# Altium PCB adio.PCBDOC (part 3 of 3)
Units mil, origin at the board's own origin, x right, y up, seen from the top; angles counter-clockwise.
Board outline 7750 x 4500 mil, 6 copper layers (Top Layer, Internal Plane 1, Mid-Layer 1, Mid-Layer 2, Internal Plane 2, Bottom Layer); 163 components, 231 nets, 1195 pads, 503 vias.
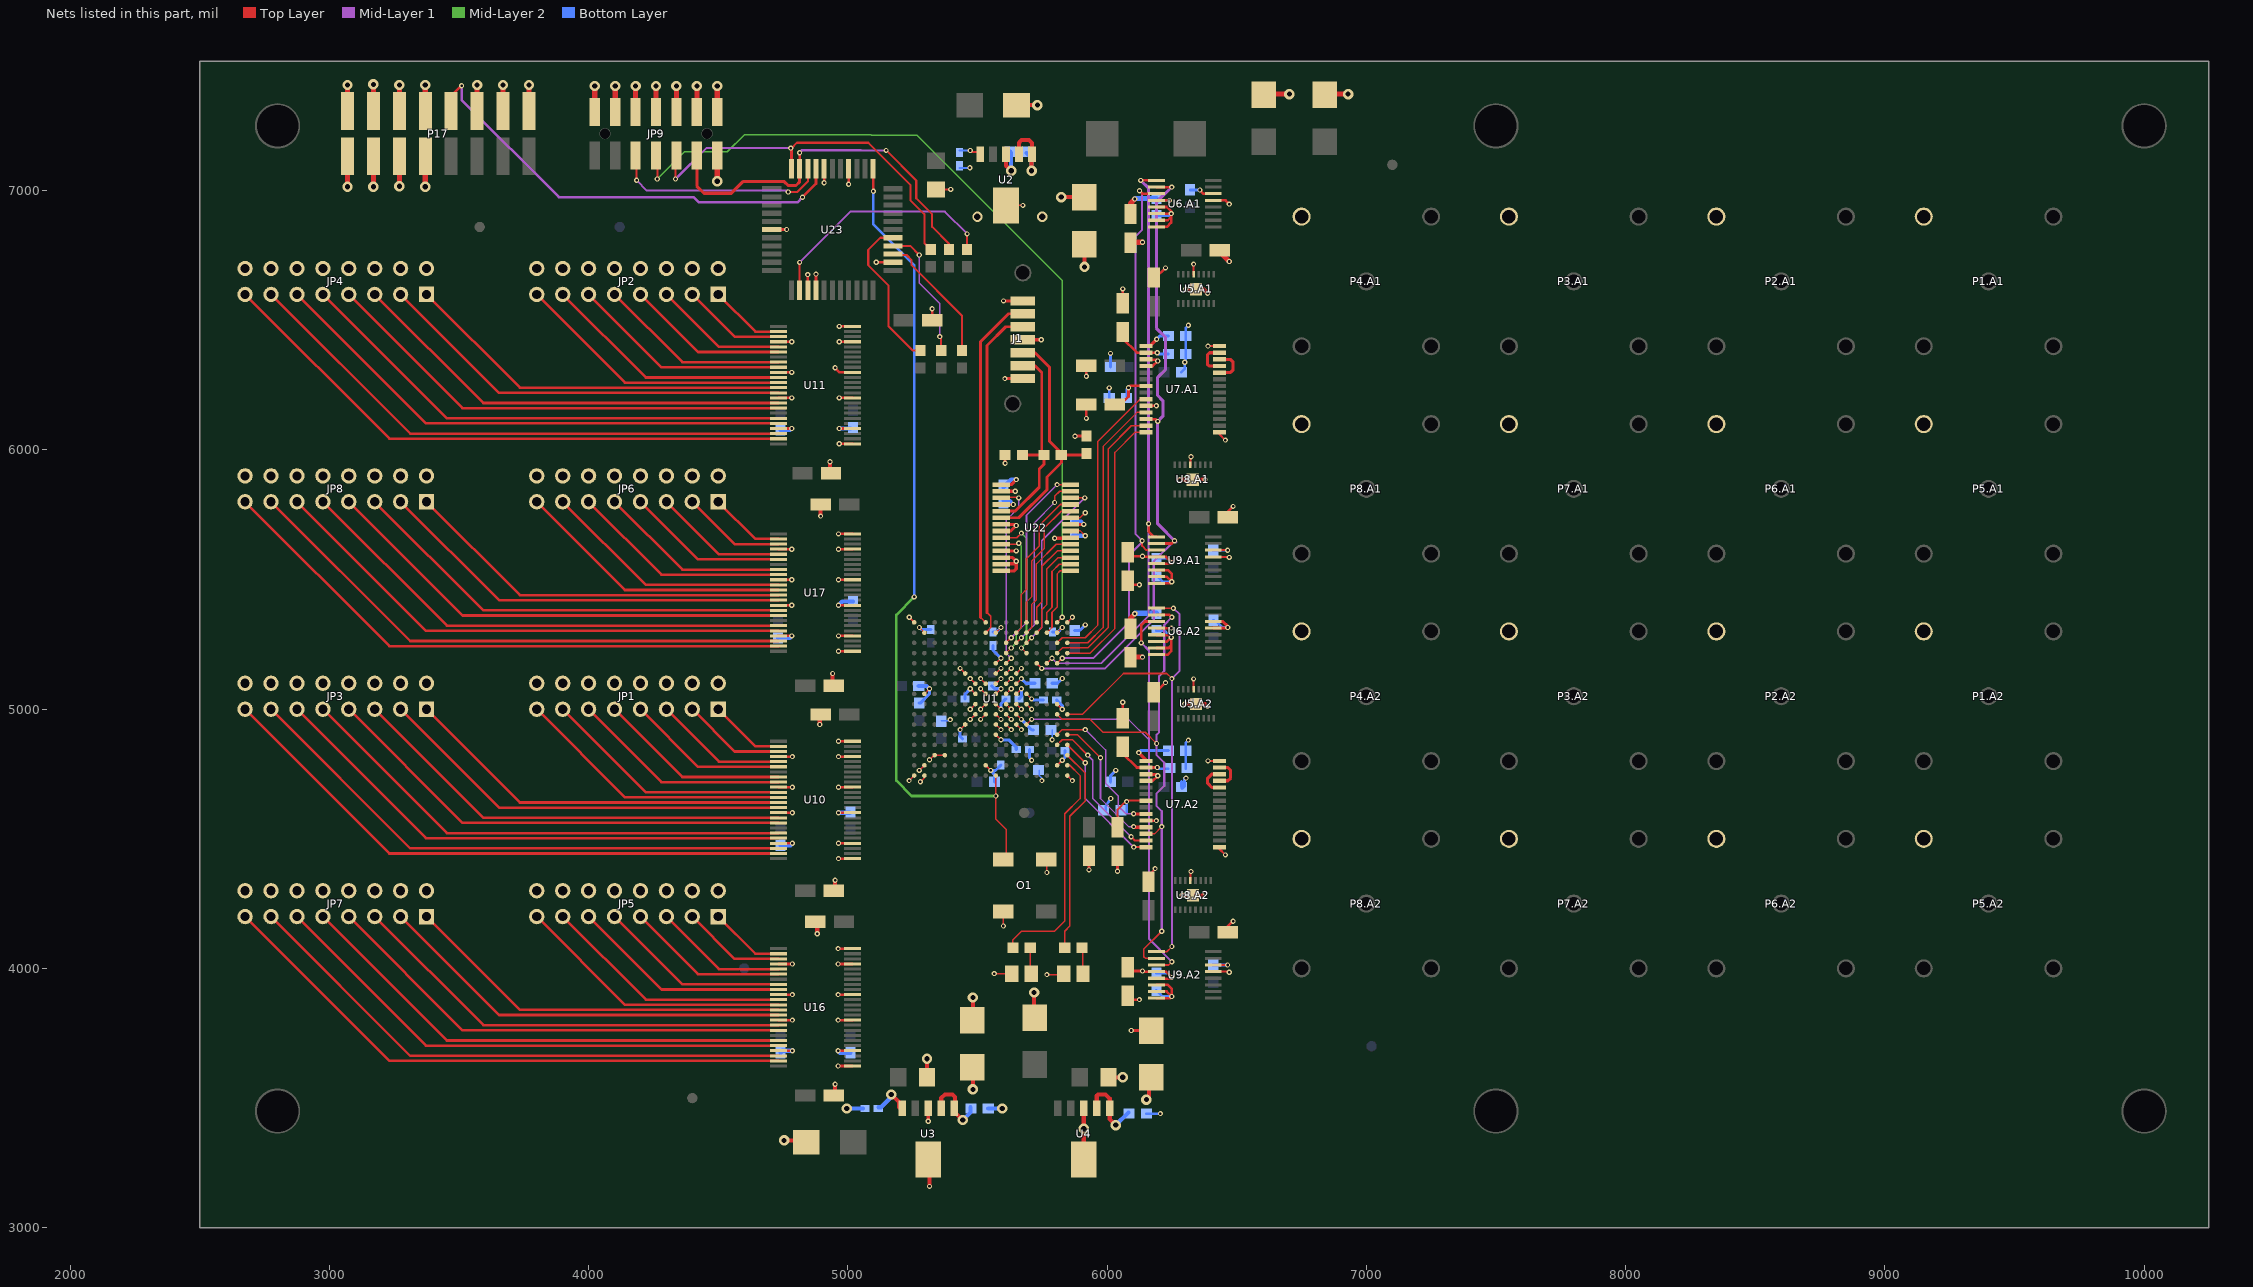
[diagram p7: the nets of this part, all layers, seen from the top]

## Via types
v1: diameter 20, hole 10, Top Layer to Bottom Layer, 322 vias
v2: diameter 20, hole 10, Top Layer to Bottom Layer, tented top, 122 vias
v3: diameter 40, hole 20, Top Layer to Bottom Layer, 57 vias
v4: diameter 40, hole 25, Top Layer to Bottom Layer, 2 vias

## Nets (pads, with @x,y where several pads share a name; then routed paths per layer and width w, separated by ;. In a path a pad name is that pad's centre, name@x,y a point inside that pad or via, vN(x,y) a via of type N, cw(c..) or ccw(c..) an arc to the next point about the centre after c; other vN are vias at no path point) (continued)
GND: C1.2 C2.1 C3.1 C4.A1.2 C4.A2.2 C5.A1.2 C5.A2.2 C6.A1.2 C6.A2.2 C7.A1.2 C7.A2.2 C8.A1.2 C8.A2.2 C9.A1.2 C9.A2.2 C10.A1.2 C10.A2.2 C11.A1.2 C11.A2.2 C12.A1.2 C12.A2.2 C13.A1.2 C13.A2.2 C14.A1.2 C14.A2.2 C15.A1.2 C15.A2.2 C16.A1.2 C16.A2.2 C17.A1.2 C17.A2.2 C18.A1.2 C18.A2.2 C19.A1.2 C19.A2.2 C20.2 C21.A1.2 C21.A2.2 C22.2 C23.2 C24.2 C25.2 C26.2 C27.2 C28.2 C29.2 C30.2 C31.2 C32.2 C33.2 C34.2 C35.2 C36.2 C37.2 C38.2 C39.2 C40.2 C41.2 C43.2 C44.2 C45.2 C46.1 C47.1 C48.2 C51.2 C52.2 C53.2 C55.2 C56.2 C57.2 C58.2 C59.2 C61.2 C62.2 C64.2 C65.2 C71.1 C73.1 C74.1 C75.2 C76.2 C77.1 C78.2 C80.1 C88.2 C98.2 C99.1 DS1.2 DS2.2 J1.1 J1.4 J1.7 JP1.2 JP1.4 JP1.6 JP1.8 JP1.10 JP1.12 JP1.14 JP1.16 JP2.2 JP2.4 JP2.6 JP2.8 JP2.10 JP2.12 JP2.14 JP2.16 JP3.2 JP3.4 JP3.6 JP3.8 JP3.10 JP3.12 JP3.14 JP3.16 JP4.2 JP4.4 JP4.6 JP4.8 JP4.10 JP4.12 JP4.14 JP4.16 JP5.2 JP5.4 JP5.6 JP5.8 JP5.10 JP5.12 JP5.14 JP5.16 JP6.2 JP6.4 JP6.6 JP6.8 JP6.10 JP6.12 JP6.14 JP6.16 JP7.2 JP7.4 JP7.6 JP7.8 JP7.10 JP7.12 JP7.14 JP7.16 JP8.2 JP8.4 JP8.6 JP8.8 JP8.10 JP8.12 JP8.14 JP8.16 JP9.1 JP9.3 JP9.5 JP9.7 JP9.9 JP9.11 JP9.13 O1.2 P1.A1.2 P1.A2.2 P2.A1.2 P2.A2.2 P3.A1.2 P3.A2.2 P4.A1.2 P4.A2.2 P5.A1.2 P5.A2.2 P6.A1.2 P6.A2.2 P7.A1.2 P7.A2.2 P8.A1.2 P8.A2.2 P17.9 P17.10 P17.11 P17.12 P17.13 P17.14 P17.15 P17.16 R5.1 U1.A1 U1.A16 U1.B2 U1.B9 U1.B15 U1.F6 U1.F11 U1.G7 U1.G8 U1.G9 U1.G10 U1.H2 U1.H7 U1.H8 U1.H9 U1.H10 U1.J7 U1.J8 U1.J9 U1.J10 U1.J15 U1.K7 U1.K8 U1.K9 U1.K10 U1.L6 U1.L11 U1.R2 U1.R8 U1.R15 U1.T1 U1.T16 U2.3 U3.3 U4.3 U5.A1.13 U5.A2.13 U6.A1.5 U6.A1.6 U6.A1.13 U6.A1.14 U6.A1.15 U6.A1.16 U6.A2.5 U6.A2.6 U6.A2.13 U6.A2.14 U6.A2.15 U6.A2.16 U7.A1.1 U7.A1.14 U7.A1.17 U7.A1.18 U7.A1.24 U7.A2.1 U7.A2.14 U7.A2.17 U7.A2.18 U7.A2.24 U8.A1.13 U8.A2.13 U9.A1.5 U9.A1.6 U9.A1.14 U9.A1.15 U9.A1.16 U9.A2.5 U9.A2.6 U9.A2.14 U9.A2.15 U9.A2.16 U10.4 U10.10 U10.15 U10.21 U10.25 U10.28 U10.34 U10.39 U10.45 U10.48 U11.4 U11.10 U11.15 U11.21 U11.25 U11.28 U11.34 U11.39 U11.45 U11.48 U16.4 U16.10 U16.15 U16.21 U16.25 U16.28 U16.34 U16.39 U16.45 U16.48 U17.4 U17.10 U17.15 U17.21 U17.25 U17.28 U17.34 U17.39 U17.45 U17.48 U22.1 U22.12 U22.13 U22.14 U22.20 U22.22 U23.4 U23.17 U23.25 | length 13613.9
  Top Layer w6: v2(5236.22,4724.41) U1.T1@5255.91,4744.09 ; v2(5236.48,5354.59) 5255.91,5335.16 U1.A1@5255.91,5334.65 ; v2(5275.59,4763.78) U1.R2@5295.28,4783.46 ; v2(5275.85,5315.22) 5295.28,5295.79 U1.B2@5295.28,5295.28 ; U1.H2@5295.28,5059.06 v2(5314.96,5078.74) ; v2(5433.07,4921.26) U1.L6@5452.76,4940.94 ; v2(5433.07,5157.48) U1.F6@5452.76,5137.8 ; v2(5472.44,4960.63) U1.K7@5492.13,4980.31 ; v2(5472.44,5000) U1.J7@5492.13,5019.69 ; v2(5472.44,5078.74) U1.H7@5492.13,5059.06 ; v2(5472.44,5118.11) U1.G7@5492.13,5098.43 ; v2(5511.81,4960.63) U1.K8@5531.5,4980.31 ; v2(5511.81,5000) U1.J8@5531.5,5019.69 ; v2(5511.81,5078.74) U1.H8@5531.5,5059.06 ; v2(5511.81,5118.11) U1.G8@5531.5,5098.43 ; U1.R8@5531.5,4783.46 v2(5551.18,4763.78) ; v1(5564.65,3980) DS2.2@5632.6,3980 ; U1.K9@5570.87,4980.31 v2(5590.55,4960.63) ; U1.J9@5570.87,5019.69 v2(5590.55,5000) ; U1.H9@5570.87,5059.06 v2(5590.55,5078.74) ; U1.G9@5570.87,5098.43 v2(5590.55,5118.11) ; U1.B9@5570.87,5295.28 v2(5590.55,5314.96) ; U1.K10@5610.24,4980.31 v2(5629.92,4960.63) ; U1.J10@5610.24,5019.69 v2(5629.92,5000) ; U1.H10@5610.24,5059.06 v2(5629.92,5078.74) ; U1.G10@5610.24,5098.43 v2(5629.92,5118.11) ; U2.3@5610.24,6943.15 v1(5674.96,6943.15) ; U1.L11@5649.61,4940.94 v2(5669.29,4921.26) ; U1.F11@5649.61,5137.8 v2(5669.29,5157.48) ; v1(5767.72,3976.38) DS1.2@5836.61,3976.38 ; v1(5767.72,4370.08) O1.2@5767.72,4419.29 ; U1.B15@5807.09,5295.28 v2(5826.77,5314.96) ; U1.T16@5846.46,4744.09 v2(5866.14,4724.41) ; U1.A16@5846.46,5334.65 v2(5866.14,5354.33) ; U22.20@5846.46,5659.45 U22.20@5866.14,5659.45 ; v1@5905.51,5712.8 v1(5909.65,5712.8)
  Top Layer w8: C71.1@5340,7004.88 v1(5396.69,7004.88) ; U1.R15@5807.09,4783.46 v2(5826.77,4803.15) ; U1.J15@5807.09,5019.69 v2(5826.77,5000) ; C4.A2.2@6160,4335.12 6160,4360 v1(6185,4385) ; U8.A2.13@6320.94,4340 6320.94,4366.63 v1@6328.41,4374.09 ; U8.A1.13@6320.94,5940 6320.94,5966.63 v1@6328.41,5974.09 ; U5.A2.13@6333.5,5074.92 v1(6333.5,5116.99) ; U5.A1.13@6333.5,6674.92 v1(6333.5,6716.99) ; v1(6389.09,4800.59) U7.A2.14@6433.46,4800.59 ; v1(6389.09,6400.59) U7.A1.14@6433.46,6400.59 ; U9.A2.5@6409.25,3987.8 v1@6468.65,3987.8 ; U9.A2.6@6409.25,4013.39 v1(6464.72,4013.39) ; U9.A1.5@6409.25,5587.8 v1@6468.65,5587.8 ; U9.A1.6@6409.25,5613.39 v1(6464.72,5613.39) ; U7.A2.1@6433.46,4467.91 6433.46,4460.95 v1(6456.35,4438.07) ; U7.A1.1@6433.46,6067.91 6433.46,6060.95 v1(6456.35,6038.07)
  Top Layer w10: U23.17@4704.72,6850.39 v1(4763.78,6850.39) ; U16.21@4732.28,3682.68 v1(4786.1,3682.68) ; U16.15@4732.28,3800.79 v1(4786.1,3800.79) ; U16.10@4732.28,3899.21 v1(4786.1,3899.21) ; U16.4@4732.28,4017.32 v1(4786.1,4017.32) ; U10.21@4732.28,4482.68 v1(4786.1,4482.68) ; U10.15@4732.28,4600.79 v1(4786.1,4600.79) ; U10.10@4732.28,4699.21 v1(4786.1,4699.21) ; U10.4@4732.28,4817.32 v1(4786.1,4817.32) ; U17.21@4732.28,5282.68 v1(4783.46,5282.68) ; U17.15@4732.28,5400.79 v1(4783.46,5400.79) ; U17.10@4732.28,5499.21 v1(4783.46,5499.21) ; U17.4@4732.28,5617.32 v1(4783.46,5617.32) ; U11.21@4732.28,6082.68 v1(4783.46,6082.68) ; U11.15@4732.28,6200.79 v1(4783.46,6200.79) ; U11.10@4732.28,6299.21 v1(4783.46,6299.21) ; U11.4@4732.28,6417.32 v1(4783.46,6417.32) ; U23.25@4845.51,6615.75 v1(4845.51,6676.22) ; v1(4950.79,6316.92) 4968.49,6299.21 U11.39@5019.69,6299.21 ; v1(4962.2,3623.62) U16.25@5017.72,3623.62 ; v1(4962.2,3682.68) U16.28@5017.72,3682.68 ; v1(4962.2,3800.79) U16.34@5017.72,3800.79 ; v1(4962.2,3899.21) U16.39@5017.72,3899.21 ; v1(4962.2,4017.32) U16.45@5017.72,4017.32 ; v1(4962.2,4076.38) U16.48@5017.72,4076.38 ; v1(4963.9,4423.62) U10.25@5017.72,4423.62 ; v1(4963.9,4482.68) U10.28@5017.72,4482.68 ; v1(4963.9,4600.79) U10.34@5017.72,4600.79 ; v1(4963.9,4699.21) U10.39@5017.72,4699.21 ; v1(4963.9,4817.32) U10.45@5017.72,4817.32 ; v1(4963.9,4876.38) U10.48@5017.72,4876.38 ; v1(4963.9,5223.62) U17.25@5017.72,5223.62 ; v1(4963.9,5282.68) U17.28@5017.72,5282.68 ; v1(4963.9,5400.79) U17.34@5017.72,5400.79 ; v1(4963.9,5499.21) U17.39@5017.72,5499.21 ; v1(4963.9,5617.32) U17.45@5017.72,5617.32 ; v1(4963.9,5676.38) U17.48@5017.72,5676.38 ; v1(4966.54,6023.62) U11.25@5017.72,6023.62 ; v1(4966.54,6082.68) U11.28@5017.72,6082.68 ; v1(4966.54,6200.79) U11.34@5017.72,6200.79 ; v1(4966.54,6417.32) U11.45@5017.72,6417.32 ; v1(4966.54,6476.38) U11.48@5017.72,6476.38 ; v1(5002.99,7024.57) U23.4@5002.99,7084.25 ; C25.2@5325.12,6500 v1(5325.12,6544.96) ; v1(5919.96,6121.72) C8.A1.2@5919.96,6170.93 ; v1(5919.96,6284.12) C10.A1.2@5919.96,6328.41 ; v1(5930,4380) C10.A2.2@5930,4434.88 ; v1(6040,4375) C8.A2.2@6040,4434.88 ; C16.A2.2@6060,4965.12 v1(6060,5026.54) ; C16.A1.2@6060,6565.12 v1(6060,6621.02) ; C14.A2.2@6080,3879.76 v1(6124.41,3879.76) ; C14.A1.2@6080,5479.76 v1(6124.41,5479.76) ; v1(6093.23,3760.55) C88.2@6170,3760.55 ; U7.A2.24@6150,4570.27 v1(6189.96,4570.27) ; U7.A1.24@6150,6170.27 v1(6189.96,6170.27) ; U7.A2.18@6151.25,4723.48 6175.85,4723.48 v1(6195.54,4743.17) 6190.62,4748.09 U7.A2.17@6151.25,4748.09 ; U7.A1.18@6151.25,6323.48 6175.85,6323.48 v1(6195.54,6343.17) 6190.62,6348.09 U7.A1.17@6151.25,6348.09 ; C13.A2.2@6180.78,5063.03 6185.7,5063.03 v1(6225.06,5102.4) ; C13.A1.2@6180.78,6663.03 6185.7,6663.03 v1(6225.06,6702.4) ; U9.A2.15@6185.7,3911.52 6229.99,3911.52 v1(6249.67,3891.84) ; U9.A1.15@6185.7,5511.52 6229.99,5511.52 v1(6249.67,5491.84) ; U9.A2.16@6190.75,3885.43 6243.27,3885.43 v1(6249.67,3891.84) ; U9.A2.14@6190.75,3936.61 6234.42,3936.61 6249.67,3921.36 v1(6249.67,3891.84) ; U6.A2.16@6190.75,5210.43 6234.06,5210.43 6247.14,5223.52 v1(6247.14,5277.03) ; U6.A2.15@6190.75,5236.02 6237.1,5236.02 6247.14,5246.06 ; U6.A2.14@6190.75,5260.43 6230.55,5260.43 v1(6247.14,5277.03) ; U6.A2.13@6190.75,5286.02 6233.92,5286.02 v1(6247.14,5277.03) ; U9.A1.16@6190.75,5485.43 6243.27,5485.43 v1(6249.67,5491.84) ; U9.A1.14@6190.75,5536.61 6234.42,5536.61 6249.67,5521.36 v1(6249.67,5491.84) ; U6.A1.16@6190.75,6860.43 6230.55,6860.43 6247.14,6877.03 6247.14,6921.46 6231.39,6937.2 U6.A1.13@6190.75,6937.2 ; U6.A1.15@6190.75,6886.02 6233.92,6886.02 6247.14,6899.24 ; U6.A1.14@6190.75,6911.61 v1(6247.14,6911.61) ; v1(6357.93,7002.58) 6372.69,6987.82 U6.A1.6@6412.06,6987.82 ; U6.A1.5@6409.25,6962.8 6456.77,6962.8 v1(6471.11,6948.45) ; C18.A2.2@6465.12,4140 6465.12,4161.42 v1(6485.88,4182.18) ; C18.A1.2@6465.12,5740 6465.12,5761.42 v1(6485.88,5782.18)
  Top Layer w12: U22.13@5590.55,5561.02 5639.76,5561.02 v1(5649.61,5570.87) ; U22.14@5591.14,5533.66 5641.93,5533.66 5649.61,5541.34 v1(5649.61,5570.87) ; U22.12@5591.14,5584.84 5635.63,5584.84 v1(5649.61,5570.87) ; U22.1@5591.14,5866.34 5630.12,5866.34 v1(5649.61,5885.83) ; v1(5600.39,6574.8) J1.7@5669.29,6574.8 ; v1(5605.71,6275) J1.1@5675,6275 ; J1.4@5675,6425 v1(5745.87,6425) ; v1(5797.24,5659.45) U22.20@5846.46,5659.45 ; U22.22@5860.43,5712.8 v1@5905.51,5712.8 ; v1(5875.98,6053.15) R5.1@5915.35,6053.15 ; U6.A2.5@6409.25,5312.8 v1@6462.8,5312.8 ; U6.A2.6@6409.25,5338.39 6446.61,5338.39 6465,5320 v1(6465,5315)
  Top Layer w15: v1(5310,3410.47) U3.3@5310,3460 ; v1(5314.96,3159.45) U3.3@5314.96,3257.87
  Top Layer w16: v3(4753.94,3336.61) C75.2@4842.52,3336.61 ; v1(4881.89,4133.86) C30.2@4881.89,4183.07 ; v1(4891.73,4940.94) C22.2@4891.73,4980.31 ; v1(4894.88,5744.88) C33.2@4894.88,5790 ; C26.2@4931.1,5905.51 v1(4931.1,5954.72) ; C34.2@4940.94,5088.58 v1(4940.94,5137.8) ; C29.2@4950.79,3513.78 v1(4950.79,3553.15) ; C20.2@4950.79,4301.18 v1(4950.79,4340.55) ; C77.1@5305.12,3580 v3(5305.12,3651.57) ; C78.2@5482.28,3799.21 v3(5482.28,3887.8) ; U2.3@5610.24,7145.67 5610.24,7096.46 v3(5629.92,7076.77) ; C1.2@5650.55,7330 v3(5731.02,7330) ; C98.2@5718.5,3818.9 v3(5718.5,3907.48) ; U4.3@5910,3263.15 U4.3@5910,3460 ; v3(5912.61,6706.06) C76.2@5912.61,6794.25 ; C99.1@6005.12,3580 v3(6060.31,3580) ; v1(6280.35,5885) U8.A1.13@6330,5885 ; v1(6289.87,4282) 6368.61,4282 v1(6377.95,4291.34) ; v1(6299.53,5020) U5.A2.13@6343.17,5020 ; v1(6303.23,6620) 6372.13,6620 v1(6387.8,6604.33) ; U8.A1.13@6328.74,5885.83 v1(6377.95,5885.83) ; U5.A2.13@6338.58,5019.69 6377.95,5019.69 v1(6387.8,5009.84)
  Top Layer w20: v3(3070,7015) P17.16@3070,7132.6 ; P17.15@3070,7290 v3(3070,7407.6) ; v3(3170,7015) P17.14@3170,7132.6 ; P17.13@3170,7292.4 v3(3170,7410) ; v3(3270,7017.4) P17.12@3270,7135 ; P17.11@3270,7290 v3(3270,7407.6) ; v3(3370,7015) P17.10@3370,7132.6 ; P17.9@3370,7290 v3(3370,7407.6) ; JP9.13@4023.78,7286.26 v3(4023.78,7403.86) ; JP9.11@4102.52,7286.26 v3(4102.52,7403.86) ; JP9.9@4181.26,7286.26 v3(4181.26,7403.86) ; JP9.7@4260,7286.26 v3(4260,7403.86) ; JP9.5@4338.74,7286.26 v3(4338.74,7403.86) ; JP9.3@4417.48,7286.26 v3(4417.48,7403.86) ; JP9.1@4496.22,7286.26 v3(4496.22,7403.86) ; C5.A2.2@6087.28,5200.82 v1(6136.49,5200.82) ; C5.A1.2@6087.28,6800.82 v1(6136.49,6800.82) ; C4.A1.2@6435.12,6770 6435.12,6763 v1(6471.11,6727.01) ; C64.2@6604.65,7372.41 v3(6703.08,7372.41) ; C65.2@6831.04,7372.41 v3(6929.47,7372.41)
  Mid-Layer 1 w12: v1(6060,5026.54) v1@6062.99,5029.53
  Bottom Layer w6: C40.2@5360,4955 5390,4955 v2(5395,4960) ; C55.2@5738.47,4764.01 5738.47,4744.33 5748.31,4734.48 v2(5748.31,4724.64) ; v2(5787.68,4882.13) C61.2@5787.68,4921.5 ; C12.A2.2@6013.07,4720 C12.A2.2@6013.07,4723.7 ; C12.A2.2@6013.78,4714.57 C12.A2.2@6013.78,4720
  Bottom Layer w8: C73.1@5430,7088.28 v1(5470.77,7088.28)
  Bottom Layer w10: C9.A2.2@5994.09,4606.3 5994.09,4625.98 v1(6013.78,4655.51) ; C9.A1.2@6008.07,6200 v1(6008.07,6239.36) ; C12.A1.2@6013.07,6320 v1(6013.07,6372.3) ; C74.1@6151.72,3440 v1(6205.75,3440) ; C15.A2.2@6190,3914.79 6212.95,3891.84 v1(6249.67,3891.84) ; C7.A2.2@6190,5303.07 6221.1,5303.07 v1(6247.14,5277.03) ; C15.A1.2@6190,5514.79 6212.95,5491.84 v1(6249.67,5491.84) ; C7.A1.2@6190,6903.07 6238.6,6903.07 v1(6247.14,6911.61) ; C11.A1.2@6286.75,6300 6299.21,6312.46 v1(6299.21,6338.58) 6303.46,6342.83 6303.46,6470.78 v1(6313.64,6480.96) ; C17.A2.2@6303.46,4770 6303.46,4870.78 v1(6313.64,4880.96) ; C6.A1.2@6320.88,7002.58 v1(6357.93,7002.58) ; C19.A2.2@6409.25,4013.39 v1(6464.72,4013.39) ; C19.A1.2@6409.25,5613.39 v1(6464.72,5613.39) ; C6.A2.2@6410,5343.46 6413.46,5340 6420,5340 6445,5315 v1(6465,5315)
  Bottom Layer w12: C52.2@5275,5023.46 5279.38,5023.46 5314.96,5059.04 v2(5314.96,5078.74) ; v2(5275.85,5315.22) 5283.73,5307.34 C37.2@5320,5307.34 ; v2(5433.07,4921.26) 5433.07,4894.59 C43.2@5442.66,4885 ; C44.2@5452.34,5040 5452.34,5058.64 v2(5472.44,5078.74) ; C45.2@5555,5089.41 5565.67,5078.74 v2(5590.55,5078.74) ; C59.2@5560,5297.34 5572.93,5297.34 v2(5590.55,5314.96) ; C53.2@5565.21,4720 5565.21,4749.75 v2(5551.18,4763.78) 5569.37,4763.78 C48.2@5590,4784.41 ; v2(5590.55,5000) 5590.55,5021.14 C58.2@5609.41,5040 ; C56.2@5700.59,4845 5700.59,4811.73 v2(5708.94,4803.38) ; C62.2@5788.46,5100 5808.7,5100 v2(5827.06,5118.36) ; C38.2@5790,5297.34 5809.15,5297.34 v2(5826.77,5314.96) ; C57.2@5805.59,5035 5826.77,5013.82 v2(5826.77,5000) ; v2(5826.77,4803.15) 5837.34,4813.72 C39.2@5837.34,4840 ; C41.2@5875,5303.46 5894.04,5303.46 v1(5915.64,5325.06) ; C12.A2.2@6013.07,4720 6013.07,4743.39 v1(6033.46,4763.78) ; C11.A2.2@6286.75,4700 6286.75,4721.79 ; C11.A2.2@6289.37,4694.88 6299.21,4704.72 v1@6299.21,4734.25
  Bottom Layer w16: C36.2@4730,5274.79 4775.57,5274.79 ; C31.2@4740,3674.79 4747.89,3682.68 v1(4786.1,3682.68) ; C23.2@4740,4474.79 4778.21,4474.79 ; C28.2@4740,6076.54 v1@4777.32,6076.54 ; v1(4962.2,3682.68) 4970.09,3674.79 C32.2@5010,3674.79 ; v1(4963.9,4600.79) C24.2@5007.32,4600.79 ; v1(4963.9,5400.79) 4978.33,5415.21 C35.2@5020,5415.21 ; v1(4966.54,6082.68) C27.2@5009.84,6082.68 ; v3(4995.43,3460) C80.1@5058.28,3460 ; C51.2@5273.46,5090 5303.7,5090 v2(5314.96,5078.74) ; C3.1@5541.72,3460 v3(5595.83,3460) ; C46.1@5600,5855.59 5630.24,5885.83 v1(5649.61,5885.83) ; C2.1@5626.54,7150 5629.92,7146.61 v3(5629.92,7076.77) ; C47.1@5870,5723.84 5898.6,5723.84 v1(5909.65,5712.8)
  other v1: 6471.11,3985.34 6323.48,4374.09 6304.21,4734.25 6471.11,5585.34 6323.48,5974.09
  other v3: 5910,3381.34
  other v4: 5500,6900 5750,6900
IORX+: J1.6 U1.A8 | length 1302.9
  Top Layer w6: 5511.81,5354.33 U1.A8@5531.5,5334.65
  Top Layer w11: 5512,5354.33 5512,6417.51 5620.08,6525.59 J1.6@5679.13,6525.59
IORX-: J1.5 U1.B8 | length 1289.5
  Top Layer w6: U1.B8@5531.5,5295.28 5551.18,5314.96 5551.18,5358.17 5537.5,5371.86
  Top Layer w11: 5537,5371.86 5537,6403.14 5608.86,6475 J1.5@5675,6475
IOTX+: J1.2 R1.2 R3.2 U22.5 | length 806.1
  Top Layer w11: U22.5@5591.14,5763.98 5645.87,5763.98 5738.19,5856.3 5738.19,5926.54 5756.54,5944.88 R3.2@5756.54,5980 5748.03,5988.5 5748.03,6299.21 5722.24,6325 J1.2@5675,6325
  Top Layer w12: R1.2@5673.46,5980 R3.2@5756.54,5980
IOTX-: J1.3 R3.1 R5.2 U22.6 | length 971.4
  Top Layer w11: U22.6@5580.71,5738.19 5659.45,5738.19 5767.72,5846.46 5767.72,5895.67 5823.46,5951.42 5823.46,5987.56 5777.56,6033.46 5777.56,6318.9 5721.46,6375 J1.3@5675,6375
  Top Layer w12: R3.1@5823.46,5980 5913.46,5980 R5.2@5920,5986.54
NetC16.A1_1: C16.A1.1 C17.A1.1 U7.A1.16 | length 226.6
  Top Layer w10: C16.A1.1@6060,6454.88 6060,6429.5 6114.5,6375 v1(6193.23,6375)
  Bottom Layer w10: v1(6193.23,6375) 6198.23,6370 C17.A1.1@6236.54,6370
NetC16.A2_1: C16.A2.1 C17.A2.1 U7.A2.16 | length 226.6
  Top Layer w10: C16.A2.1@6060,4854.88 6060,4829.5 6114.5,4775 v1(6193.23,4775)
  Bottom Layer w10: v1(6193.23,4775) 6198.23,4770 C17.A2.1@6236.54,4770
NetC21.A1_1: C21.A1.1 U7.A1.15 | length 102.9
  Top Layer w12: U7.A1.15@6150,6400.59 6164.37,6400.59 v1(6190.94,6427.17)
  Bottom Layer w12: v1(6190.94,6427.17) 6203.78,6440 C21.A1.1@6236.54,6440
NetC21.A2_1: C21.A2.1 U7.A2.15 | length 159.3
  Top Layer w12: v1(6122.05,4832.68) U7.A2.15@6151.57,4803.15
  Bottom Layer w12: v1(6122.05,4832.68) 6129.37,4840 C21.A2.1@6236.54,4840
NetC73_2: C73.2 U2.5 | length 82.2
  Top Layer w8: v1(5472.14,7155.21) 5477.35,7150 U2.5@5510,7150
  Bottom Layer w8: C73.2@5430,7155.21 v1(5472.14,7155.21)
NetC80_2: C80.2 U3.5 | length 127
  Top Layer w16: v3(5167.32,3513.78) 5196.85,3484.25 U3.5@5196.85,3464.57
  Bottom Layer w16: C80.2@5118.11,3464.57 5127.95,3464.57 v3@5167.32,3503.94
NetDS1_1: DS1.1 R6.2 | length 102.8
  Top Layer w6: DS1.1@5905.51,3981.89 R6.2@5905.51,4084.65
NetDS2_1: DS2.1 R7.2 | length 108.3
  Top Layer w6: DS2.1@5703.46,3971.73 R7.2@5703.46,4080
NetJP1_1: JP1.1 U10.2 | length 291.6
  Top Layer w10: JP1.1@4500,5000 4643.31,4856.69 U10.2@4732.28,4856.69
NetJP1_3: JP1.3 U10.3 | length 399.8
  Top Layer w10: JP1.3@4400,5000 4562.99,4837.01 U10.3@4732.28,4837.01
NetJP1_5: JP1.5 U10.5 | length 516.1
  Top Layer w10: JP1.5@4300,5000 4502.36,4797.64 U10.5@4732.28,4797.64
NetJP1_7: JP1.7 U10.6 | length 624.3
  Top Layer w10: JP1.7@4200,5000 4422.05,4777.95 U10.6@4732.28,4777.95
NetJP1_9: JP1.9 U10.8 | length 740.6
  Top Layer w10: JP1.9@4100,5000 4361.42,4738.58 U10.8@4732.28,4738.58
NetJP1_11: JP1.11 U10.9 | length 848.7
  Top Layer w10: JP1.11@4000,5000 4281.1,4718.9 U10.9@4732.28,4718.9
NetJP1_13: JP1.13 U10.11 | length 965
  Top Layer w10: JP1.13@3900,5000 4220.47,4679.53 U10.11@4732.28,4679.53
NetJP1_15: JP1.15 U10.12 | length 1073.2
  Top Layer w10: JP1.15@3800,5000 4140.16,4659.84 U10.12@4732.28,4659.84
NetJP2_1: JP2.1 U11.2 | length 291.6
  Top Layer w10: JP2.1@4500,6600 4643.31,6456.69 U11.2@4732.28,6456.69
NetJP2_3: JP2.3 U11.3 | length 399.8
  Top Layer w10: JP2.3@4400,6600 4562.99,6437.01 U11.3@4732.28,6437.01
NetJP2_5: JP2.5 U11.5 | length 516.1
  Top Layer w10: JP2.5@4300,6600 4502.36,6397.64 U11.5@4732.28,6397.64
NetJP2_7: JP2.7 U11.6 | length 624.3
  Top Layer w10: JP2.7@4200,6600 4422.05,6377.95 U11.6@4732.28,6377.95
NetJP2_9: JP2.9 U11.8 | length 740.6
  Top Layer w10: JP2.9@4100,6600 4361.42,6338.58 U11.8@4732.28,6338.58
NetJP2_11: JP2.11 U11.9 | length 848.7
  Top Layer w10: JP2.11@4000,6600 4281.1,6318.9 U11.9@4732.28,6318.9
NetJP2_13: JP2.13 U11.11 | length 965
  Top Layer w10: JP2.13@3900,6600 4220.47,6279.53 U11.11@4732.28,6279.53
NetJP2_15: JP2.15 U11.12 | length 1073.2
  Top Layer w10: JP2.15@3800,6600 4140.16,6259.84 U11.12@4732.28,6259.84
NetJP3_1: JP3.1 U10.13 | length 1506.3
  Top Layer w10: JP3.1@3375,5000 3734.84,4640.16 U10.13@4732.28,4640.16
NetJP3_3: JP3.3 U10.14 | length 1614.5
  Top Layer w10: JP3.3@3275,5000 3654.53,4620.47 U10.14@4732.28,4620.47
NetJP3_5: JP3.5 U10.16 | length 1730.8
  Top Layer w10: JP3.5@3175,5000 3593.9,4581.1 U10.16@4732.28,4581.1
NetJP3_7: JP3.7 U10.17 | length 1839
  Top Layer w10: JP3.7@3075,5000 3513.58,4561.42 U10.17@4732.28,4561.42
NetJP3_9: JP3.9 U10.19 | length 1955.3
  Top Layer w10: JP3.9@2975,5000 3452.95,4522.05 U10.19@4732.28,4522.05
NetJP3_11: JP3.11 U10.20 | length 2063.4
  Top Layer w10: JP3.11@2875,5000 3372.64,4502.36 U10.20@4732.28,4502.36
NetJP3_13: JP3.13 U10.22 | length 2179.7
  Top Layer w10: JP3.13@2775,5000 3312.01,4462.99 U10.22@4732.28,4462.99
NetJP3_15: JP3.15 U10.23 | length 2287.9
  Top Layer w10: JP3.15@2675,5000 3231.69,4443.31 U10.23@4732.28,4443.31
NetJP4_1: JP4.1 U11.13 | length 1506.3
  Top Layer w10: JP4.1@3375,6600 3734.84,6240.16 U11.13@4732.28,6240.16
NetJP4_3: JP4.3 U11.14 | length 1614.5
  Top Layer w10: JP4.3@3275,6600 3654.53,6220.47 U11.14@4732.28,6220.47
NetJP4_5: JP4.5 U11.16 | length 1730.8
  Top Layer w10: JP4.5@3175,6600 3593.9,6181.1 U11.16@4732.28,6181.1
NetJP4_7: JP4.7 U11.17 | length 1839
  Top Layer w10: JP4.7@3075,6600 3513.58,6161.42 U11.17@4732.28,6161.42
NetJP4_9: JP4.9 U11.19 | length 1955.3
  Top Layer w10: JP4.9@2975,6600 3452.95,6122.05 U11.19@4732.28,6122.05
NetJP4_11: JP4.11 U11.20 | length 2063.4
  Top Layer w10: JP4.11@2875,6600 3372.64,6102.36 U11.20@4732.28,6102.36
NetJP4_13: JP4.13 U11.22 | length 2179.7
  Top Layer w10: JP4.13@2775,6600 3312.01,6062.99 U11.22@4732.28,6062.99
NetJP4_15: JP4.15 U11.23 | length 2287.9
  Top Layer w10: JP4.15@2675,6600 3231.69,6043.31 U11.23@4732.28,6043.31
NetJP5_1: JP5.1 U16.2 | length 291.6
  Top Layer w10: JP5.1@4500,4200 4643.31,4056.69 U16.2@4732.28,4056.69
NetJP5_3: JP5.3 U16.3 | length 399.8
  Top Layer w10: JP5.3@4400,4200 4562.99,4037.01 U16.3@4732.28,4037.01
NetJP5_5: JP5.5 U16.5 | length 516.1
  Top Layer w10: JP5.5@4300,4200 4502.36,3997.64 U16.5@4732.28,3997.64
NetJP5_7: JP5.7 U16.6 | length 624.3
  Top Layer w10: JP5.7@4200,4200 4422.05,3977.95 U16.6@4732.28,3977.95
NetJP5_9: JP5.9 U16.8 | length 740.6
  Top Layer w10: JP5.9@4100,4200 4361.42,3938.58 U16.8@4732.28,3938.58
NetJP5_11: JP5.11 U16.9 | length 848.7
  Top Layer w10: JP5.11@4000,4200 4281.1,3918.9 U16.9@4732.28,3918.9
NetJP5_13: JP5.13 U16.11 | length 965
  Top Layer w10: JP5.13@3900,4200 4220.47,3879.53 U16.11@4732.28,3879.53
NetJP5_15: JP5.15 U16.12 | length 1073.2
  Top Layer w10: JP5.15@3800,4200 4140.16,3859.84 U16.12@4732.28,3859.84
NetJP6_1: JP6.1 U17.2 | length 291.6
  Top Layer w10: JP6.1@4500,5800 4643.31,5656.69 U17.2@4732.28,5656.69
NetJP6_3: JP6.3 U17.3 | length 399.8
  Top Layer w10: JP6.3@4400,5800 4562.99,5637.01 U17.3@4732.28,5637.01
NetJP6_5: JP6.5 U17.5 | length 516.1
  Top Layer w10: JP6.5@4300,5800 4502.36,5597.64 U17.5@4732.28,5597.64
NetJP6_7: JP6.7 U17.6 | length 624.3
  Top Layer w10: JP6.7@4200,5800 4422.05,5577.95 U17.6@4732.28,5577.95
NetJP6_9: JP6.9 U17.8 | length 740.6
  Top Layer w10: JP6.9@4100,5800 4361.42,5538.58 U17.8@4732.28,5538.58
NetJP6_11: JP6.11 U17.9 | length 848.7
  Top Layer w10: JP6.11@4000,5800 4281.1,5518.9 U17.9@4732.28,5518.9
NetJP6_13: JP6.13 U17.11 | length 965
  Top Layer w10: JP6.13@3900,5800 4220.47,5479.53 U17.11@4732.28,5479.53
NetJP6_15: JP6.15 U17.12 | length 1073.2
  Top Layer w10: JP6.15@3800,5800 4140.16,5459.84 U17.12@4732.28,5459.84
NetJP7_1: JP7.1 U16.13 | length 1506.3
  Top Layer w10: JP7.1@3375,4200 3734.84,3840.16 U16.13@4732.28,3840.16
NetJP7_3: JP7.3 U16.14 | length 1614.5
  Top Layer w10: JP7.3@3275,4200 3654.53,3820.47 U16.14@4732.28,3820.47
NetJP7_5: JP7.5 U16.16 | length 1730.8
  Top Layer w10: JP7.5@3175,4200 3593.9,3781.1 U16.16@4732.28,3781.1
NetJP7_7: JP7.7 U16.17 | length 1839
  Top Layer w10: JP7.7@3075,4200 3513.58,3761.42 U16.17@4732.28,3761.42
NetJP7_9: JP7.9 U16.19 | length 1955.3
  Top Layer w10: JP7.9@2975,4200 3452.95,3722.05 U16.19@4732.28,3722.05
NetJP7_11: JP7.11 U16.20 | length 2063.4
  Top Layer w10: JP7.11@2875,4200 3372.64,3702.36 U16.20@4732.28,3702.36
NetJP7_13: JP7.13 U16.22 | length 2179.7
  Top Layer w10: JP7.13@2775,4200 3312.01,3662.99 U16.22@4732.28,3662.99
NetJP7_15: JP7.15 U16.23 | length 2287.9
  Top Layer w10: JP7.15@2675,4200 3231.69,3643.31 U16.23@4732.28,3643.31
NetJP8_1: JP8.1 U17.13 | length 1506.3
  Top Layer w10: JP8.1@3375,5800 3734.84,5440.16 U17.13@4732.28,5440.16
NetJP8_3: JP8.3 U17.14 | length 1614.5
  Top Layer w10: JP8.3@3275,5800 3654.53,5420.47 U17.14@4732.28,5420.47
NetJP8_5: JP8.5 U17.16 | length 1730.8
  Top Layer w10: JP8.5@3175,5800 3593.9,5381.1 U17.16@4732.28,5381.1
NetJP8_7: JP8.7 U17.17 | length 1839
  Top Layer w10: JP8.7@3075,5800 3513.58,5361.42 U17.17@4732.28,5361.42
NetJP8_9: JP8.9 U17.19 | length 1955.3
  Top Layer w10: JP8.9@2975,5800 3452.95,5322.05 U17.19@4732.28,5322.05
NetJP8_11: JP8.11 U17.20 | length 2063.4
  Top Layer w10: JP8.11@2875,5800 3372.64,5302.36 U17.20@4732.28,5302.36
NetJP8_13: JP8.13 U17.22 | length 2179.7
  Top Layer w10: JP8.13@2775,5800 3312.01,5262.99 U17.22@4732.28,5262.99
NetJP8_15: JP8.15 U17.23 | length 2287.9
  Top Layer w10: JP8.15@2675,5800 3231.69,5243.31 U17.23@4732.28,5243.31
NetP17_7: P17.7 U23.8 | length 1791.9
  Top Layer w10: P17.7@3470,7307.4 3470,7365 v1(3510,7405) ; v1(4825,6975) 4877.01,7027.01 U23.8@4877.01,7084.25
  Mid-Layer 1 w10: v1(3510,7405) 3510,7350 3885,6975 4405,6975 4425,6955 4805,6955 v1(4825,6975) v1@4820,6975
NetR6_1: R6.1 U1.P16 | length 804
  Top Layer w6: R6.1@5836.54,4080 5836.54,4143.62 5856.3,4163.39 5856.3,4586.61 5915.35,4645.67 5915.35,4753.94 U1.P16@5846.46,4822.83
NetR7_1: R7.1 U1.R16 | length 913.9
  Top Layer w6: R7.1@5636.54,4078.03 5636.54,4110.94 5669.29,4143.7 5797.24,4143.7 5836.61,4183.07 5836.61,4596.46 5895.67,4655.51 5895.67,4744.09 5856.3,4783.46 U1.R16@5846.46,4783.46
NetR12_1: R12.1 U23.38 | length 603.8
  Top Layer w8: U23.38@5174.25,6818.5 5125.59,6818.5 5078.74,6771.65 5078.74,6712.6 5157.48,6633.86 5157.48,6476.38 5250.39,6383.46 R12.1@5280,6383.46
NetR13_1: R13.1 U23.24 | length 930.3
  Top Layer w8: U23.24@4814.02,6615.75 v1(4814.02,6723.46) ; R13.1@5460,6773.46 v1(5460,6833.31)
  Mid-Layer 1 w8: v1(4814.02,6723.46) 5009.84,6919.29 5374.02,6919.29 v1(5460,6833.31)
NetR15_1: R15.1 U23.37 | length 519.3
  Top Layer w8: U23.37@5174.25,6787.01 5240.55,6787.01 v1(5275.59,6751.97) ; v1(5354.33,6437.01) 5360,6431.34 R15.1@5360,6383.46
  Mid-Layer 1 w6: v1(5275.59,6751.97) 5275.59,6643.7 5354.33,6564.96 v1(5354.33,6437.01)
NetR16_1: R16.1 U23.36 | length 516
  Top Layer w8: U23.36@5167.32,6751.97 5226.38,6751.97 5246.06,6732.28 5246.06,6712.6 5440,6518.66 R16.1@5440,6383.46
NetU1_C15: U1.C15 U7.A1.23 | length 1147.4
  Top Layer w6: U1.C15@5807.09,5255.91 5826.77,5275.59 5915.35,5275.59 5964.57,5324.8 5964.57,6033.46 6126.97,6195.87 U7.A1.23@6150,6195.87
NetU1_C16: U1.C16 U7.A1.25 | length 1081
  Top Layer w6: U1.C16@5846.46,5255.91 5925.2,5255.91 5984.25,5314.96 5984.25,6013.78 6115.16,6144.69 U7.A1.25@6150,6144.69
NetU1_D15: U1.D15 U7.A1.27 | length 1109.8
  Top Layer w6: U1.D15@5807.09,5216.54 5826.77,5236.22 5925.2,5236.22 6003.94,5314.96 6003.94,6003.94 6093.5,6093.5 U7.A1.27@6150,6093.5
NetU1_D16: U1.D16 U7.A1.28 | length 1054
  Top Layer w6: U1.D16@5846.46,5216.54 5935.04,5216.54 6030,5311.5 6030,5990.63 6107.28,6067.91 U7.A1.28@6150,6067.91
NetU1_E13: U1.E13 U6.A1.10 U7.A1.26 U9.A1.10 | length 2522.3
  Top Layer w6: U1.E13@5728.35,5177.17 v2(5748.03,5157.48)
  Top Layer w10: U7.A1.26@6150,6119.09 6185.91,6119.09 v1(6195,6110) ; U9.A1.10@6190.75,5638.98 6248.98,5638.98 v1(6260,5650) ; U6.A1.10@6190.75,7013.98 v1(6248.98,7013.98)
  Mid-Layer 1 w8: v2(5748.03,5157.48) 5992.48,5157.48 6180,5345 6180,5570 v1(6260,5650)
  Mid-Layer 1 w12: v1(6248.98,7013.98) 6190,6955 6190,6470 6225,6435 6225,6310 6195,6280 6195,6210 6215,6190 6215,6130 v1(6195,6110) 6195,5715 v1@6265,5645
NetU1_E14: U1.E14 U6.A1.9 U9.A1.9 | length 2336.9
  Top Layer w6: U1.E14@5767.72,5177.17 v2(5787.4,5196.85)
  Top Layer w10: v1(6129.57,7039.57) U6.A1.9@6190.75,7039.57 ; v1(6160,5715) 6160,5685 6180.43,5664.57 U9.A1.9@6190.75,5664.57
  Mid-Layer 1 w6: v2(5787.4,5196.85) 5807.09,5177.17 5977.17,5177.17 5986.83,5186.83
  Mid-Layer 1 w8: 5986.83,5186.83 6160,5360 v1(6160,5715)
  Mid-Layer 1 w12: v1(6129.57,7039.57) 6160,7009.13 6160,5685
NetU1_E15: U1.E15 U6.A1.11 U9.A1.11 | length 2207
  Top Layer w6: U1.E15@5807.09,5177.17 v2(5826.77,5196.85)
  Top Layer w8: v1(6135,5650) 6135,5630 6151.61,5613.39 U9.A1.11@6190.75,5613.39
  Top Layer w10: v1(6125,7000) 6136.61,6988.39 U6.A1.11@6190.75,6988.39
  Mid-Layer 1 w8: v2(5826.77,5196.85) 5946.85,5196.85 6085,5335 6085,5595 6135,5645 v1(6135,5650) 6110,5675 6110,6825 6135,6850 6135,6990 v1(6125,7000)
NetU1_K15: U1.K15 U6.A2.10 U7.A2.26 U9.A2.10 | length 2012.3
  Top Layer w6: U1.K15@5807.09,4980.31 5826.77,4960.63 5935.04,4960.63 5984.25,4911.42 6147.38,4911.42 v1(6190.94,4867.85) ; U7.A2.26@6150,4519.09 6182.48,4519.09 v1(6210.63,4547.24) ; U9.A2.10@6190.75,4038.98 6148.03,4038.98 6141.73,4045.28 6141.73,4074.8 v1(6210.63,4143.7)
  Top Layer w10: U6.A2.10@6190.75,5363.98 6240.35,5363.98 v1(6250,5354.33)
  Mid-Layer 1 w8: v1(6210.63,4143.7) 6210.63,4606.3 6190.94,4625.98 6190.94,4675.2 6220.47,4704.72 6220.47,4793.31 6190.94,4822.83 6190.94,4901.57 6200.79,4911.42 6200.79,5127.95 6220.47,5147.64 6220.47,5324.8 v1(6250,5354.33)
NetU1_K16: U1.K16 U6.A2.9 U9.A2.9 | length 1936.5
  Top Layer w6: U1.K16@5846.46,4980.31 5905.51,4980.31 6062.99,5137.8 6230.31,5137.8 v1(6250,5118.11) ; U9.A2.9@6190.75,4064.57 6229.92,4064.57 v1(6250,4084.65) ; U6.A2.9@6190.75,5389.57 v1(6255.71,5389.57)
  Mid-Layer 1 w8: v1(6250,4084.65) v1(6250,5118.11) 6279.53,5147.64 6279.53,5365.75 v1(6255.71,5389.57)
NetU1_L12: U1.L12 U6.A2.11 U9.A2.11 | length 1990.1
  Top Layer w6: U1.L12@5688.98,4940.94 v2(5708.66,4960.63) ; U9.A2.11@6190.75,4013.39 6237.8,4013.39 v1(6250,4025.59)
  Top Layer w10: v1(6131.89,5255.91) 6131.89,5324.8 6145.47,5338.39 U6.A2.11@6190.75,5338.39
  Mid-Layer 1 w6: v2(5708.66,4960.63) 6082.68,4960.63 6161.42,4881.89
  Mid-Layer 1 w8: v1(6131.89,5255.91) 6161.42,5226.38 6161.42,4114.17 v1(6250,4025.59)
NetU1_M15: U1.M15 U7.A2.23 | length 583.9
  Top Layer w6: U1.M15@5807.09,4901.57 5826.77,4921.26 v1(5915.35,4921.26) ; v1(6102.36,4596.46) v1@6102.95,4595.87
  Top Layer w12: v1@6102.95,4595.87 U7.A2.23@6150,4595.87
  Mid-Layer 1 w6: v1(5915.35,4921.26) 5994.09,4842.52 5994.09,4714.57 6043.31,4665.35 6043.31,4625.98 6072.83,4596.46 v1(6102.36,4596.46)
NetU1_M16: U1.M16 U7.A2.25 | length 543.6
  Top Layer w6: U1.M16@5846.46,4901.57 5885.83,4901.57 v1(5974.41,4812.99)
  Top Layer w8: v1(6102.36,4547.24) v1@6104.92,4544.69
  Top Layer w12: v1@6104.92,4544.69 U7.A2.25@6150,4544.69
  Mid-Layer 1 w6: v1(5974.41,4812.99) 5974.41,4655.51 6082.68,4547.24 v1(6102.36,4547.24)
NetU1_N15: U1.N15 U7.A2.27 | length 598.4
  Top Layer w6: U1.N15@5807.09,4862.2 5826.77,4881.89 5866.14,4881.89 v1(5925.2,4822.83)
  Top Layer w8: v1(6092.52,4507.87) 6106.89,4493.5 U7.A2.27@6150,4493.5
  Mid-Layer 1 w6: v1(5925.2,4822.83) 5944.88,4803.15 5944.88,4655.51 v1(6092.52,4507.87)
NetU1_N16: U1.N16 U7.A2.28 | length 547.6
  Top Layer w8: U1.N16@5846.46,4862.2 v1(5915.35,4793.31) ; v1(6102.95,4467.91) U7.A2.28@6150,4467.91
  Mid-Layer 1 w6: v1(5915.35,4793.31) 5915.35,4655.51 v1(6102.95,4467.91)
NetU7.A1_10: U7.A1.10 U7.A1.12 | length 140.1
  Top Layer w12: U7.A1.12@6433.46,6349.41 6475.39,6349.41 6486.22,6338.58 6486.22,6309.06 6476.38,6299.21 U7.A1.10@6437.01,6299.21
NetU7.A1_11: U7.A1.11 U7.A1.13 | length 135.6
  Top Layer w12: U7.A1.11@6433.46,6323.82 6392.72,6323.82 6387.8,6328.74 6387.8,6368.11 6394.69,6375 U7.A1.13@6433.46,6375
NetU7.A2_10: U7.A2.10 U7.A2.12 | length 124.1
  Top Layer w12: U7.A2.10@6433.46,4698.23 6404.13,4698.23 6387.8,4714.57 6387.8,4734.25 6402.95,4749.41 U7.A2.12@6433.46,4749.41
NetU7.A2_11: U7.A2.11 U7.A2.13 | length 124.3
  Top Layer w12: U7.A2.11@6433.46,4723.82 6465.94,4723.82 6476.38,4734.25 6476.38,4763.78 6465.16,4775 U7.A2.13@6433.46,4775
REFCLK: U1.E10 U22.3 | length 743.4
  Top Layer w6: U22.3@5590.55,5816.93 v1@5659.45,5816.93 ; U1.E10@5610.24,5177.17 v2(5629.92,5196.85)
  Mid-Layer 1 w6: v2(5629.92,5196.85) 5610.24,5216.54 5610.24,5728.35 5659.45,5777.56 v1(5659.45,5814.93)
RXCLK: U1.D12 U22.9 | length 572.5
  Top Layer w6: U22.9@5591.14,5661.61 5651.77,5661.61 v1(5669.29,5679.13) ; v2(5669.29,5236.22) U1.D12@5688.98,5216.54
  Mid-Layer 2 w6: v2(5669.29,5236.22) 5688.98,5255.91 5688.98,5659.45 v1(5669.29,5679.13)
RXDAT0: U1.C10 U22.28 | length 741
  Top Layer w6: U1.C10@5610.24,5255.91 v2(5629.92,5275.59) ; v1(5807.09,5866.14) U22.28@5856.3,5866.14
  Mid-Layer 1 w6: v2(5629.92,5275.59) 5688.98,5334.65 5688.98,5748.03 v1(5807.09,5866.14)
RXDAT1: U1.C11 U22.27 | length 696.1
  Top Layer w6: U1.C11@5649.61,5255.91 v2(5669.29,5275.59) ; v1(5797.24,5797.24) 5797.24,5821.06 5816.93,5840.75 U22.27@5858.86,5840.75
  Mid-Layer 1 w6: v2(5669.29,5275.59) 5718.5,5324.8 5718.5,5718.5 v1(5797.24,5797.24)
RXDAT2: U1.C12 U22.26 | length 707
  Top Layer w6: U1.C12@5688.98,5255.91 v2(5708.66,5275.59) ; U22.26@5858.86,5815.16 v1(5913.58,5815.16)
  Mid-Layer 1 w6: v2(5708.66,5275.59) 5748.03,5314.96 5748.03,5649.61 v1(5913.58,5815.16)
RXDAT3: U1.B11 U22.25 | length 604.3
  Top Layer w6: U1.B11@5649.61,5295.28 5669.29,5314.96 5669.29,5442.91 5688.98,5462.6 5688.98,5580.71 5738.19,5629.92 5738.19,5708.66 5819.09,5789.57 U22.25@5858.86,5789.57
RXDAT4: U1.A12 U22.24 | length 520.7
  Top Layer w6: U1.A12@5688.98,5334.65 5688.98,5413.39 5708.66,5433.07 5708.66,5570.87 5757.87,5620.08 5757.87,5698.82 5823.03,5763.98 U22.24@5858.86,5763.98
RXDAT5: U1.B12 U22.19 | length 443.6
  Top Layer w6: U1.B12@5688.98,5295.28 5708.66,5314.96 5708.66,5403.54 5727.43,5422.32 5727.43,5560.11 5803.35,5636.02 U22.19@5858.86,5636.02
RXDAT6: U1.A13 U22.18 | length 360.1
  Top Layer w6: U1.A13@5728.35,5334.65 5728.35,5393.7 5748.03,5413.39 5748.03,5551.18 5807.28,5610.43 U22.18@5858.86,5610.43
RXDAT7: U1.B13 U22.17 | length 371.5
  Top Layer w6: U1.B13@5728.35,5295.28 5748.03,5314.96 5748.03,5383.86 5767.72,5403.54 5767.72,5541.34 5811.22,5584.84 U22.17@5858.86,5584.84
RXDAT8: U1.A14 U22.16 | length 288
  Top Layer w6: U1.A14@5767.72,5334.65 5767.72,5374.02 5787.4,5393.7 5787.4,5531.5 5815.16,5559.25 U22.16@5858.86,5559.25
RXDAT9: U1.B14 U22.15 | length 299.4
  Top Layer w6: U1.B14@5767.72,5295.28 5787.4,5314.96 5787.4,5374.02 5807.09,5393.7 5807.09,5521.65 5819.09,5533.66 U22.15@5858.86,5533.66
RXLOCK: U1.D10 U22.10 | length 521.6
  Top Layer w6: U22.10@5591.14,5636.02 5655.71,5636.02 v1(5659.45,5639.76) ; U1.D10@5610.24,5216.54 v2(5629.92,5236.22)
  Mid-Layer 2 w6: v2(5629.92,5236.22) 5649.61,5255.91 5649.61,5295.28 5669.29,5314.96 5669.29,5629.92 v1(5659.45,5639.76)
SYSCLK: O1.3 U1.T9 U23.1 | length 3207
  Top Layer w6: U1.T9@5570.87,4744.09 5570.87,4576.77 5610.24,4537.4 5610.24,4430.24 O1.3@5600,4420
  Top Layer w10: U23.1@5097.48,7084.25 5097.48,6998.98 v1(5098.43,6998.03)
  Mid-Layer 2 w10: v1(5255.91,5433.07) 5187.01,5364.17 5187.01,4724.41 5246.06,4665.35 v1(5570.87,4665.35)
  Bottom Layer w10: v1(5098.43,6998.03) 5098.43,6870.08 5255.91,6712.6 v1(5255.91,5433.07)
TCK: JP9.6 R11.1 U23.11 | length 1493.4
  Top Layer w8: v1(4335,7045) JP9.6@4335,7145 ; v1(4779.41,7164.41) 4782.52,7164.41 4803.15,7185.04 5078.74,7185.04 5241.28,7022.5 5241.28,6963.44 5295.28,6909.45 5295.28,6798.19 R11.1@5320,6773.46
  Top Layer w10: U23.11@4782.52,7084.25 v1@4782.52,7164.41
  Mid-Layer 1 w8: v1(4335,7045) 4454.41,7164.41 v1(4779.41,7164.41)
TDI: JP9.10 U23.9 | length 834.7
  Top Layer w8: v1(4185,7040) JP9.10@4185,7130 ; v1(4770,6995) 4805,6995 4845.51,7035.51 U23.9@4845.51,7084.25
  Mid-Layer 1 w8: v1(4185,7040) 4225,7000 4765,7000 v1(4770,6995)
TDO: JP9.8 U1.A15 | length 3296.6
  Top Layer w6: U1.A15@5807.09,5334.65 v2(5826.77,5354.33)
  Top Layer w8: v1(4265,7045) JP9.8@4265,7150
  Mid-Layer 2 w6: v1(4265,7045) 4370,7150 4535,7150 4600,7215 5090,7215 ; 5090,7214.57 5265.75,7214.57 5826.77,6653.54 v2(5826.77,5354.33)
TMS: JP9.4 R14.2 U23.10 | length 1495
  Top Layer w8: v1(5147.64,7155.51) 5264.89,7038.26 ; 5263.91,7037.29 5263.91,6970.35 5324.8,6909.45 5324.8,6860.24 5390,6795.04 R14.2@5390,6773.46
  Top Layer w10: U23.10@4814.02,7084.25 v1(4814.02,7146.69)
  Top Layer w12: JP9.4@4417.48,7136.34 4417.48,7017.52 4445,6990 4550,6990 4595,7035 4755,7035 4770,7020 4800,7020 4814.02,7034.02 U23.10@4814.02,7090
  Mid-Layer 1 w8: 5049.21,7155.51 v1(5147.64,7155.51)
  Mid-Layer 1 w10: v1(4814.02,7146.69) 4822.83,7155.51 5049.21,7155.51
VCC: C2.2 C3.2 C5.A1.1 C5.A2.1 C7.A1.1 C7.A2.1 C8.A1.1 C8.A2.1 C9.A1.1 C9.A2.1 C14.A1.1 C14.A2.1 C15.A1.1 C15.A2.1 C46.2 C47.2 C56.1 C57.1 C58.1 C59.1 C61.1 C62.1 C74.2 C76.1 C78.1 C88.1 JP9.2 O1.4 P17.1 P17.3 P17.5 R1.1 U1.E9 U1.F9 U1.F10 U1.G11 U1.H11 U1.H12 U1.J11 U1.J12 U1.K11 U1.L9 U1.L10 U1.M9 U1.P3 U1.P4 U1.T2 U2.1 U2.2 U3.1 U3.2 U4.1 U4.2 U6.A1.12 U6.A2.12 U7.A1.21 U7.A2.21 U9.A1.12 U9.A1.13 U9.A2.12 U9.A2.13 U22.2 U22.4 U22.7 U22.8 U22.11 U22.21 U22.23 U23.7 U23.26 U23.35 | length 4662.2
  Top Layer w6: v2(5280,4720) 5295.28,4735.28 U1.T2@5295.28,4744.09 ; v2(5315,4805) U1.P3@5335,4825 ; U1.P3@5334.65,4822.83 U1.P4@5374.02,4822.83 ; U1.M9@5570.87,4901.57 v2(5590.55,4881.89) ; U1.L9@5570.87,4940.94 v2(5590.55,4921.26) ; U1.F9@5570.87,5137.8 v2(5590.55,5157.48) ; U1.E9@5570.87,5177.17 v2(5590.55,5196.85) ; U22.8@5590.55,5688.98 U22.8@5591.14,5688.98 ; U22.4@5591.14,5789.57 v1(5637.6,5789.57) ; U22.2@5591.14,5840.75 U22.2@5600.39,5840.75 ; v1(5600,4163.78) O1.4@5600,4220 ; U1.L10@5610.24,4940.94 v2(5629.92,4921.26) ; U1.F10@5610.24,5137.8 v2(5629.92,5157.48) ; U1.K11@5649.61,4980.31 v2(5669.29,4960.63) ; U1.J11@5649.61,5019.69 v2(5669.29,5000) ; U1.H11@5649.61,5059.06 v2(5669.29,5078.74) ; U1.G11@5649.61,5098.43 v2(5669.29,5118.11) ; U1.J12@5688.98,5019.69 v2(5708.66,5000) ; U1.H12@5688.98,5059.06 v2(5708.94,5039.62) ; U22.21@5856.3,5688.98 5895.67,5688.98 v1(5915.35,5669.29) ; U22.23@5856.3,5738.19 U22.23@5858.86,5738.19 ; U22.23@5858.86,5738.39 5895.87,5738.39 v1(5915.35,5757.87)
  Top Layer w8: C8.A2.1@6040,4545.12 6040,4612.83 6074.21,4647.05 U7.A2.21@6150,4647.05
  Top Layer w10: U23.26@4877.01,6615.75 v1(4877.01,6678.19) ; v1(4908.5,7030.47) U23.7@4908.5,7084.25 ; v1(5109.84,6724.02) U23.35@5174.25,6724.02 ; C8.A1.1@6030.12,6175 6051.98,6175 6082.36,6205.38 v1(6082.36,6239.83) 6089.57,6247.05 U7.A1.21@6150,6247.05 ; C14.A2.1@6077.44,3990.26 v1(6136.49,3990.26) ; C14.A1.1@6077.44,5590.26 v1(6136.49,5590.26) ; v1@6138.95,3987.8 6227.53,3987.8 v1(6249.67,3965.65) 6244.75,3960.73 U9.A2.13@6190.62,3960.73 ; v1@6138.95,5587.8 6227.53,5587.8 v1(6249.67,5565.65) 6244.75,5560.73 U9.A1.13@6190.62,5560.73 ; U6.A2.12@6190.75,5312.8 v1(6247.83,5312.8) ; U6.A1.12@6190.75,6962.8 v1(6240.25,6962.8)
  Top Layer w12: U22.11@5591.14,5610.43 v1(5649.41,5610.43) ; U22.8@5591.14,5687.2 5628.15,5687.2 v1(5649.61,5708.66) 5645.47,5712.8 U22.7@5591.14,5712.8 ; U22.2@5600.39,5840.75 v1(5645.47,5840.75) ; v1(5606.54,5948.58) R1.1@5606.54,5980
  Top Layer w16: U3.2@5360,3460 5360,3499.76 5374.02,3513.78 5403.54,3513.78 5413.39,3503.94 5413.39,3463.39 U3.1@5410,3460 5410,3448.27 v3(5442.91,3415.35) ; v3(5482.28,3533.46) C78.1@5482.28,3622.05 ; U2.2@5659.45,7155.51 5659.45,7185.04 5669.29,7194.88 5698.82,7194.88 5710,7183.7 U2.1@5710,7150 ; v3(5708.66,7076.77) U2.1@5708.66,7155.51 ; v3(5823.08,6975.35) C76.1@5912.61,6975.35 ; U4.2@5960,3460 5960,3509.21 5964.57,3513.78 5994.09,3513.78 6010,3497.87 6010,3419.13 v3(6033.46,3395.67) ; v3(6151.57,3494.09) 6161.42,3503.94 C88.1@6161.42,3582.68
  Top Layer w20: P17.5@3570,7290 v3(3570,7407.6) ; P17.3@3670,7290 v3(3670,7407.6) ; P17.1@3770,7290 v3(3770,7407.6) ; v3(4496.22,7036.14) JP9.2@4496.22,7153.74 ; C5.A2.1@6090,5310 6090,5351.18 v1(6106.96,5368.14) ; C5.A1.1@6090,6910 6090,6951.18 v1(6106.96,6968.14)
  Mid-Layer 1 w10: v1@5108.27,6722.44 v1(5109.84,6724.02)
  Bottom Layer w6: 6075,4632.47 v1(6075,4643.5)
  Bottom Layer w10: C9.A2.1@6075,4600 6075,4632.47 ; C9.A1.1@6075,6200 6075,6232.47 v1(6082.36,6239.83) ; C15.A2.1@6190,3981.72 6233.6,3981.72 v1(6249.67,3965.65) ; C7.A2.1@6190,5370 C7.A2.1@6196.78,5363.22 ; C15.A1.1@6190,5581.72 6233.6,5581.72 v1(6249.67,5565.65) ; C7.A1.1@6190,6970 6196.78,6963.22 6239.83,6963.22 v1(6240.25,6962.8)
  Bottom Layer w12: C59.1@5560,5246.16 5560,5227.4 v2(5590.55,5196.85) ; v2(5590.55,4881.89) 5620.59,4881.89 5649.41,4853.07 C56.1@5649.41,4845 ; C58.1@5660.59,5040 5669.29,5048.7 v2(5669.29,5078.74) ; v2(5669.29,4960.63) 5709.92,4920 C61.1@5716.54,4920 ; v2(5669.29,5118.11) 5687.4,5100 C62.1@5721.54,5100 ; v2@5713.56,5035 C57.1@5754.41,5035
  Bottom Layer w16: v3(5442.91,3415.35) 5472.44,3444.88 C3.2@5472.44,3464.57 ; C46.2@5600,5804.41 5622.76,5804.41 v1(5637.6,5789.57) ; C2.2@5688.98,7145.67 5708.66,7125.98 v3(5708.66,7076.77) ; C47.2@5870,5672.66 5873.37,5669.29 v1(5915.35,5669.29) ; v3(6033.46,3395.67) C74.2@6082.68,3444.88
  Bottom Layer w20: v1@6108.82,5370 C7.A2.1@6190,5370 ; v1@6108.82,6970 C7.A1.1@6190,6970
pads on no net: FID1.0 FID2.0 FID3.0 FID4.0 FID5.0 FID6.0 FID7.0 FID10.0 J1.0 JP9.0 JP9.12 JP9.14 O1.1 P1.A1.3 P1.A1.4 P1.A1.5 P1.A2.3 P1.A2.4 P1.A2.5 P2.A1.3 P2.A1.4 P2.A1.5 P2.A2.3 P2.A2.4 P2.A2.5 P3.A1.3 P3.A1.4 P3.A1.5 P3.A2.3 P3.A2.4 P3.A2.5 P4.A1.3 P4.A1.4 P4.A1.5 P4.A2.3 P4.A2.4 P4.A2.5 P5.A1.3 P5.A1.4 P5.A1.5 P5.A2.3 P5.A2.4 P5.A2.5 P6.A1.3 P6.A1.4 P6.A1.5 P6.A2.3 P6.A2.4 P6.A2.5 P7.A1.3 P7.A1.4 P7.A1.5 P7.A2.3 P7.A2.4 P7.A2.5 P8.A1.3 P8.A1.4 P8.A1.5 P8.A2.3 P8.A2.4 P8.A2.5 S1.0 S2.0 S3.0 S4.0 S5.0 S6.0 U1.A9 U1.A10 U1.B10 U1.B16 U1.C3 U1.C4 U1.C8 U1.C9 U1.D9 U1.D11 U1.D14 U1.E3 U1.E4 U1.E6 U1.E11 U1.E16 U1.F5 U1.F12 U1.F13 U1.F14 U1.F15 U1.G5 U1.G12 U1.G13 U1.G14 U1.G15 U1.G16 U1.H3 U1.H4 U1.H13 U1.H14 U1.H15 U1.H16 U1.J3 U1.J4 U1.J13 U1.J14 U1.J16 U1.K4 U1.K5 U1.K12 U1.K13 U1.K14 U1.L4 U1.L5 U1.L13 U1.L14 U1.L15 U1.M4 U1.M6 U1.M7 U1.M10 U1.M13 U1.M14 U1.N8 U1.N10 U1.N11 U1.N12 U1.N14 U1.P9 U1.P10 U1.P11 U1.P12 U1.P13 U1.P14 U1.P15 U1.R9 U1.R10 U1.R11 U1.R12 U1.R13 U1.T8 U1.T10 U1.T12 U1.T13 U1.T14 U5.A1.8 U5.A1.9 U5.A2.8 U5.A2.9 U7.A1.22 U7.A2.22 U8.A1.8 U8.A1.9 U8.A2.8 U8.A2.9 U23.2 U23.3 U23.5 U23.6 U23.12 U23.13 U23.14 U23.16 U23.18 U23.19 U23.20 U23.21 U23.22 U23.23 U23.27 U23.28 U23.29 U23.30 U23.31 U23.32 U23.33 U23.34 U23.41 U23.42 U23.43 U23.44

## Polygon pours and split planes (outlines as drawn)
GND on Top Layer (solid): 6299.21,3385.83 4685.04,3385.83 4685.04,3051.18 6299.21,3051.18
GND on Top Layer (solid): 5472.44,7047.24 5826.77,7047.24 5826.77,6614.17 5511.81,6614.17 5511.81,6830.71 5393.7,6830.71 5393.7,7047.24
+1.2VCC on Mid-Layer 1 (solid): 6043.6,3198.97 6043.6,5374.28 5216.79,5374.28 5216.79,3198.97
+1.8VCC on Mid-Layer 1 (solid): 4685.04,7440.94 5944.88,7440.94 5944.88,6535.43 4685.04,6535.43
+2.5VCC on Mid-Layer 2 (solid): 4724.64,6535.75 4724.64,3149.76 5895.96,3149.76 5895.96,6535.75
+5VCC on Bottom Layer (solid): 6142.03,7441.31 6142.03,3051.33 2585,3051.33 2585,7451.15 6142.03,7451.15
AVDD on Bottom Layer (solid): 6181.4,7451.15 6181.4,3819.08 10197.35,3819.08 10197.35,7451.15
GND on Internal Plane 1 (split plane): 6236.23,5133.77 cw(c6240.46,5138.05) 6234.45,5138.05 6234.45,5197.1 cw(c6240.46,5197.1) 6246.48,5197.1 6246.48,5140.54 6254.56,5132.46 cw(c6250.31,5128.2) 6256.32,5128.2 cw(c6250.31,5128.2) 6246.05,5123.95
GND on Internal Plane 1 (split plane): 2520.01,3020.01 2520.01,7479.98 6283.66,7479.98 6283.66,7037.74 ccw(c6289.68,7037.74) 6295.69,7037.74 6295.69,7479.98 10229.99,7479.98 10229.99,3020.01 6236.63,3020.01 6236.63,3848.61 ccw(c6230.62,3848.61) 6224.6,3848.61 6224.6,3020.01
VCC on Internal Plane 2 (split plane): 2520.01,3020.01 2520.01,7479.98 10229.99,7479.98 10229.99,3020.01

## Keep-outs
Keep-Out Layer:
  lines w10: 2050,3050 2050,7450 10200,7450 10200,3050 2050,3050

## Other copper
Internal Plane 1 (plane layer: these items are gaps in the copper):
  lines w12: 6230.62,3000 6230.62,3848.61 ; 6230.62,4094.69 6230.62,4212.8 ; 6230.62,4350.61 6230.62,4399.82 ; 6240.46,4872.28 6240.46,5069.15 ; 6240.46,5197.1 6240.46,5138.05 6250.31,5128.2 ; 6250.31,5403.81 6250.31,5472.71 ; 6250.31,5689.25 6250.31,5817.21 ; 6250.31,5955.02 6250.31,6014.07 ; 6250.31,6437.32 6250.31,6545.6 ; 6289.68,6752.3 6289.68,6850.73 ; 6289.68,7037.74 6289.68,7500

## Silkscreen, mask and mechanical layers (free items; w line width, h text height)
Top Overlay:
  drawing of 336 lines, arcs and shapes, not listed
  text "version 1.1.1" at 7675,3400 h30
  text "2007" at 8170,3245 h60
  text "ADIO" at 7670,3235 h120
  text "Copyright Eric Jonas" at 7670,3150 h40
  text "Soma" at 6265,3100 h300
  text "The Wilson Lab, PILM" at 7670,3075 h40
  text "soma.mit.edu" at 8515,3075 h80
Mechanical 4:
  lines w8: 2000,4250 10260,4250 ; 2000,5050 10260,5050 ; 2000,5850 10260,5850 ; 2000,6650 10260,6650 ; 4500,3000 4500,7500 ; 4650,3000 4650,7500 ; 6500,3000 6500,7500 ; 6750,3000 6750,3020 ; 7000,3020 7000,7500 ; 7800,3020 7800,7500 ; 8600,3020 8600,7500 ; 9400,3020 9400,7500
Mechanical 5:
  the board outline again, w1
Drill Drawing:
  text ".LEGEND" at 10450,3200 h60
  text "Drill Drawing." at 10450,3100 h60

## Dimensions
2050,3050 to 2050,7450 on Mechanical 1
2050,3050 to 10200,3050 on Mechanical 1